# Allegro board FootPeda-2l.brd
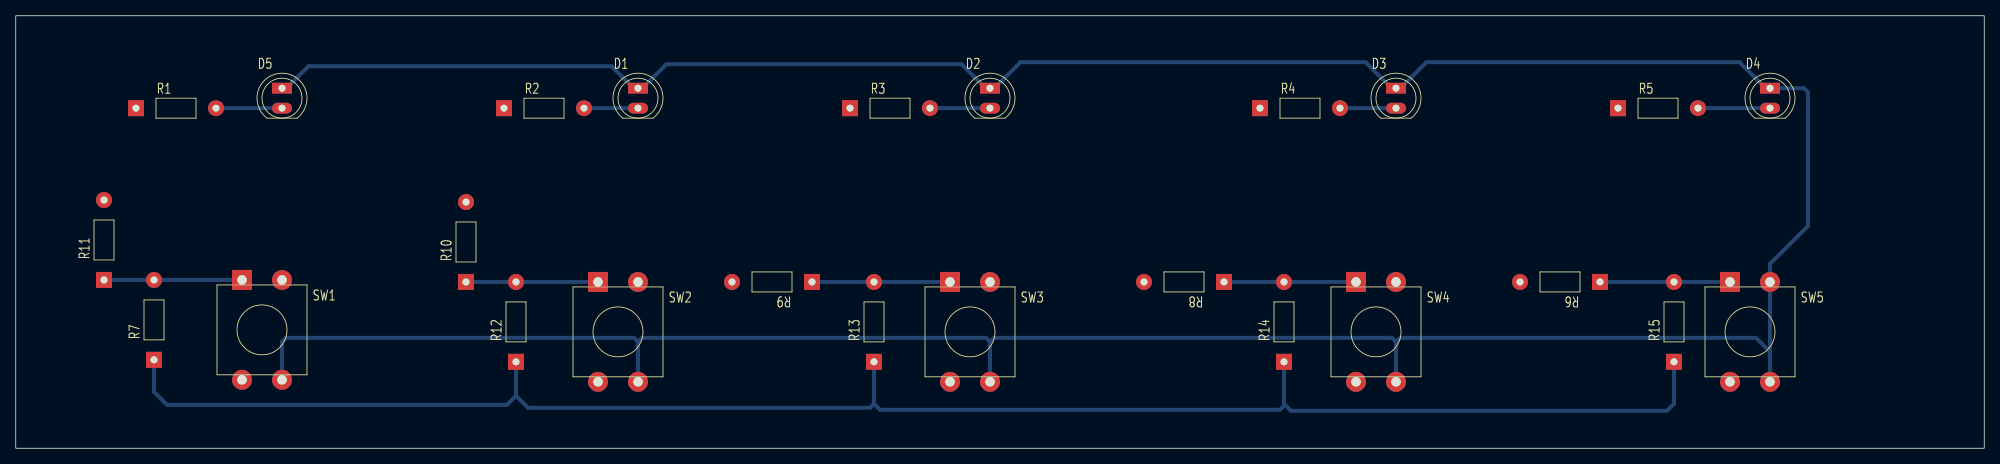
[diagram p0: board, top side]
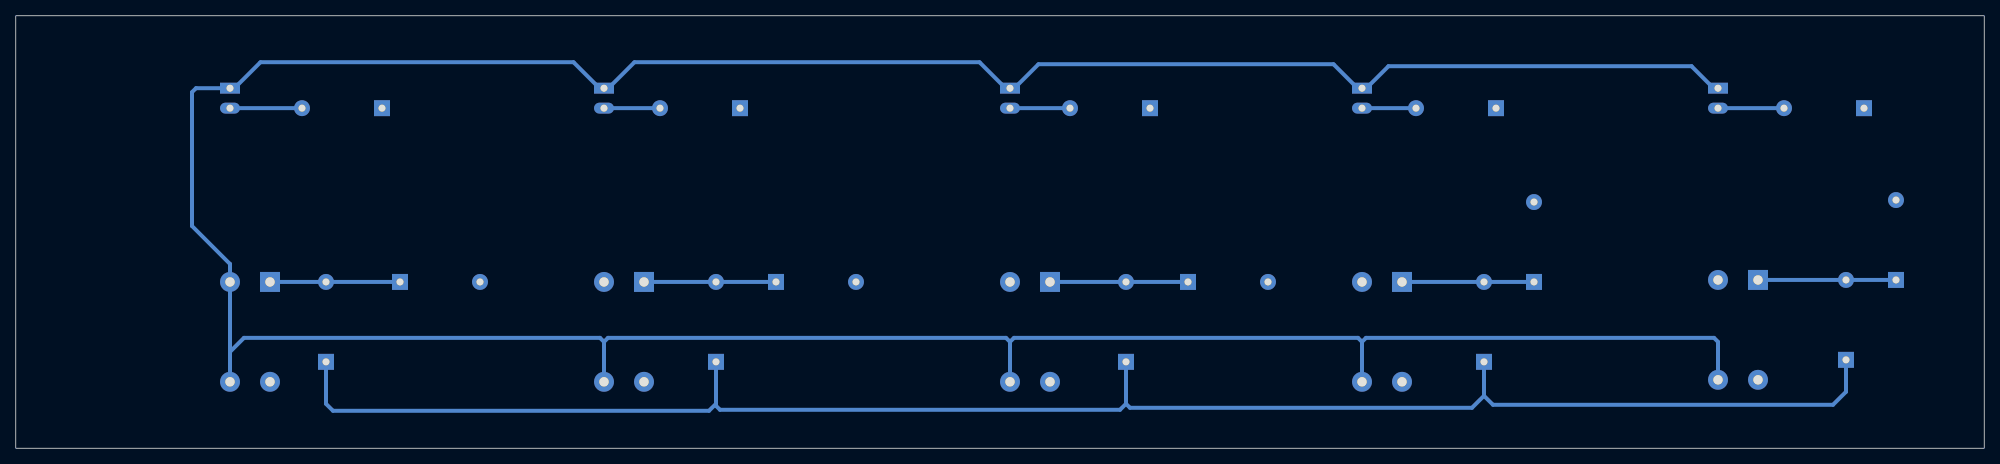
[diagram p1: board, bottom side, seen from below]

Outline 250 x 55 mm; copper layers: TOP, BOTTOM. Coordinates in mm from the lower left corner of the outline.
Outline path: rectangle 0,0 250,55

## Design rules (mm)
constraint set DEFAULT: min track width 0.508

## Placement (name value [footprint] x y rotation side)
D1  LED  [GU-LED5MM]  79.03 45.79 0 top
D2  LED  [GU-LED5MM]  123.73 45.79 0 top
D3  LED  [GU-LED5MM]  175.29 45.79 0 top
D4  LED  [GU-LED5MM]  222.79 45.79 0 top
D5  LED  [GU-LED5MM]  33.81 45.79 0 top
R1  330R  [GU-RC400]  15.27 43.25 0 top
R2  330R  [GU-RC400]  62.01 43.25 0 top
R3  330R  [GU-RC400]  105.95 43.25 0 top
R4  330R  [GU-RC400]  158.02 43.25 0 top
R5  330R  [GU-RC400]  203.49 43.25 0 top
R6  1K  [GU-RC400]  201.2 21.15 180 top
R7  10K  [GU-RC400]  17.56 11.24 90 top
R8  1K  [GU-RC400]  153.45 21.15 180 top
R9  1K  [GU-RC400]  101.12 21.15 180 top
R10  1K  [GU-RC400]  57.18 21.15 90 top
R11  1K  [GU-RC400]  11.21 21.4 90 top
R12  10K  [GU-RC400]  63.53 10.99 90 top
R13  10K  [GU-RC400]  109 10.99 90 top
R14  10K  [GU-RC400]  161.07 10.99 90 top
R15  10K  [GU-RC400]  210.6 10.99 90 top
SW1  Pushbutton-4pin  [GU-PUSH52]  28.73 21.4 0 top
SW2  Pushbutton-4pin  [GU-PUSH52]  73.95 21.15 0 top
SW3  Pushbutton-4pin  [GU-PUSH52]  118.65 21.15 0 top
SW4  Pushbutton-4pin  [GU-PUSH52]  170.21 21.15 0 top
SW5  Pushbutton-4pin  [GU-PUSH52]  217.71 21.15 0 top

## Library data of the parts
D1-D5 = LED
R1-R15 = RESISTOR_1
SW1-SW5 = Pushbutton-4pin

## Footprints (pads in the part's own frame, mm; a bottom-side part is the same pattern mirrored in y, then rotated)
GU-LED5MM
  rect 2.54x1.397 hole 0.889: 1(0,0)
  oval 2.54x1.397 hole 0.889: 2(0,-2.54)
GU-PUSH52
  rect 2.54x2.54 hole 1.194: 1(0,0)
  round 2.54 hole 1.194: 2(5.08,0) 3(0,-12.7) 4(5.08,-12.7)
GU-RC400
  rect 2.032x2.032 hole 0.889: 1(0,0)
  round 2.032 hole 0.889: 2(10.16,0)

## Nets
3V3: R7.1 R12.1 R13.1 R14.1 R15.1
GND: D1.1(CATHODE) D2.1(CATHODE) D3.1(CATHODE) D4.1(CATHODE) D5.1(CATHODE) SW1.2 SW1.4 SW2.2 SW2.4 SW3.2 SW3.4 SW4.2 SW4.4 SW5.2 SW5.4
GPIO15: R8.1 R14.2 SW4.1 SW4.3
GPIO 14: R6.1 R15.2 SW5.1 SW5.3
GPIO 18: R9.1 R13.2 SW3.1 SW3.3
GPIO 23: R10.1 R12.2 SW2.1 SW2.3
GPIO 24: R7.2 R11.1 SW1.1 SW1.3
GPIO PINS: R1.1 R2.1 R3.1 R4.1 R5.1
N00282: D5.2 R1.2
N00301: D1.2 R2.2
N00309: D2.2 R3.2
N00319: D3.2 R4.2
N00325: D4.2 R5.2

Pads without a net: R6 2; R8 2; R9 2; R10 2; R11 2

## Routing (per net, layer and track width the routed paths; a pad name or vN(x,y) marks a point on that pad's centre or on a via; arc(x,y) is an arc through that point)
3V3: length 220.9
  BOTTOM w0.508: R15.1 210.6,5.66 209.71,4.77 161.96,4.77 161.07,5.66 ; R7.1 17.56,7.18 19.21,5.53 62.39,5.53 63.53,6.67 ; R14.1 161.07,5.66 ; 161.07,5.66 161.07,5.4 160.56,4.89 109.76,4.89 109,5.66 ; R13.1 109,5.66 ; 109,5.66 108.49,5.15 65.06,5.15 63.53,6.67 ; 63.53,6.67 R12.1
GND: length 454.4
  BOTTOM w0.508: 123.73,13.53 123.22,14.04 79.53,14.04 79.03,13.53 ; 123.73,13.53 SW3.4 ; 123.73,13.53 124.24,14.04 174.78,14.04 175.29,13.53 ; SW1.4 33.81,13.53 34.32,14.04 78.52,14.04 79.03,13.53 ; 79.03,13.53 SW2.4 ; 222.79,12.26 SW5.4 ; 222.79,12.26 SW5.2 222.79,23.44 227.62,28.26 227.62,45.28 227.11,45.79 D4.1 222.22,45.79 218.92,49.09 179.17,49.09 175.86,45.79 D3.1 174.72,45.79 171.42,49.09 127.6,49.09 124.3,45.79 D2.1 123.16,45.79 120.11,48.84 82.65,48.84 79.6,45.79 D1.1 78.45,45.79 75.66,48.58 37.18,48.58 34.39,45.79 D5.1 ; 222.79,12.26 221.01,14.04 175.8,14.04 175.29,13.53 ; SW4.4 175.29,13.53
GPIO15: length 16.8
  BOTTOM w0.508: R8.1 R14.2 SW4.1
GPIO 14: length 16.5
  BOTTOM w0.508: R6.1 R15.2 SW5.1
GPIO 18: length 17.5
  BOTTOM w0.508: SW3.1 R13.2 R9.1
GPIO 23: length 16.8
  BOTTOM w0.508: R10.1 R12.2 SW2.1
GPIO 24: length 17.5
  BOTTOM w0.508: R11.1 R7.2 SW1.1
N00282: length 8.4
  BOTTOM w0.508: D5.2 R1.2
N00301: length 6.9
  BOTTOM w0.508: D1.2 R2.2
N00309: length 7.6
  BOTTOM w0.508: D2.2 R3.2
N00319: length 7.1
  BOTTOM w0.508: D3.2 R4.2
N00325: length 9.1
  BOTTOM w0.508: D4.2 R5.2
